# Altium PCB R3P900.PcbDoc
Units mil, origin at the board's own origin, x right, y up, seen from the top; angles counter-clockwise.
Board outline 6000 x 4000 mil, 2 copper layers (Top Layer, Bottom Layer); 10 components, 6 nets, 24 pads, 0 vias.
Unrouted connection lines stored in the file: 17.
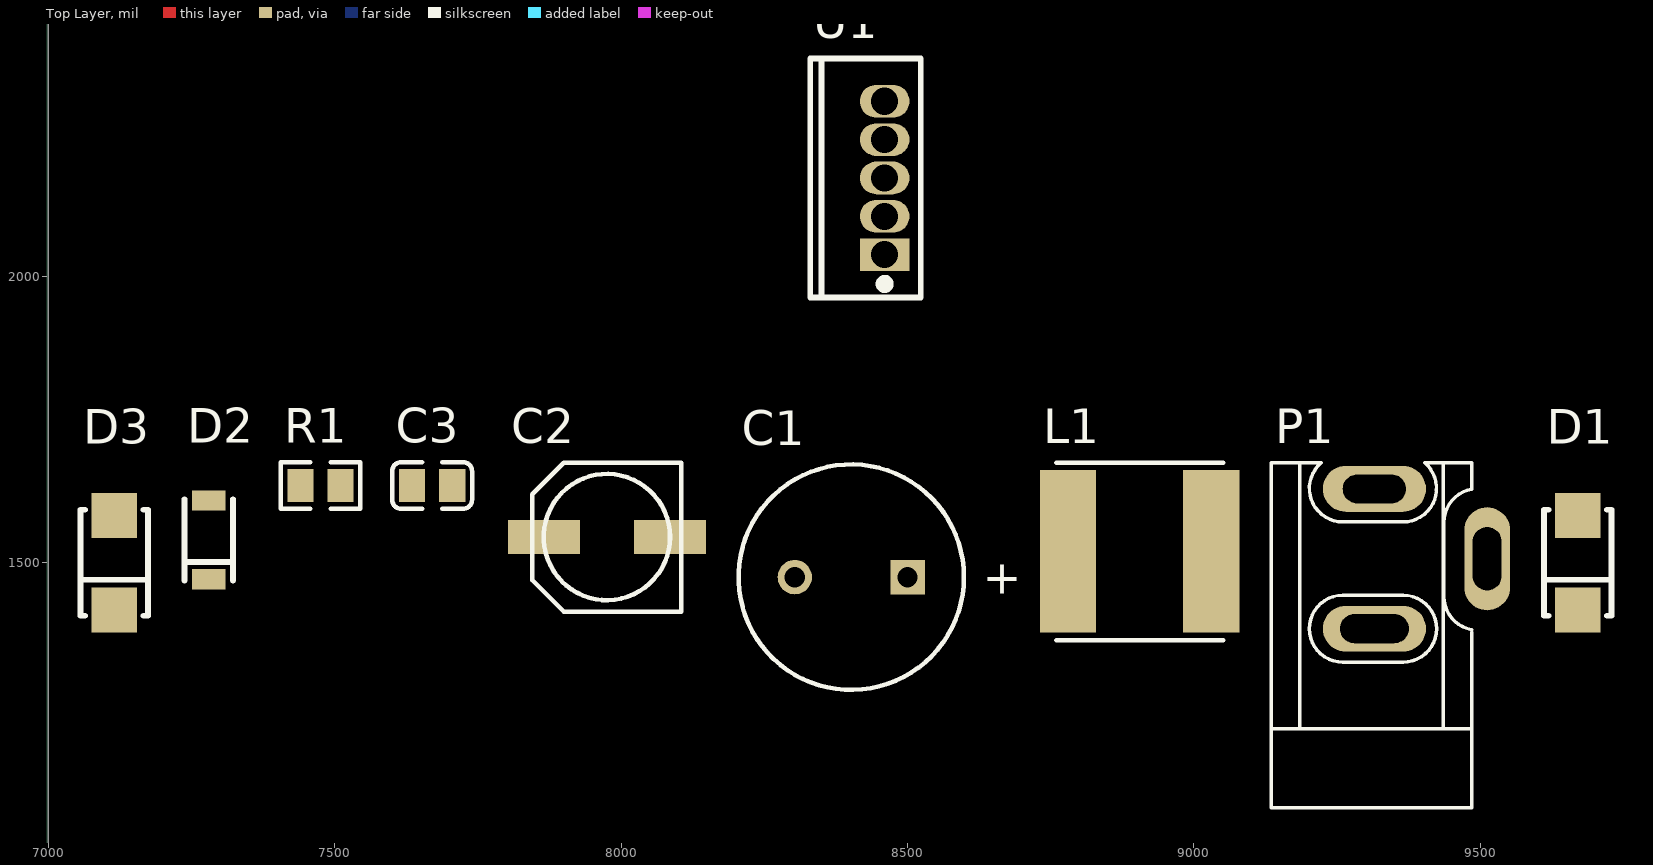
[diagram p0: Top Layer view]
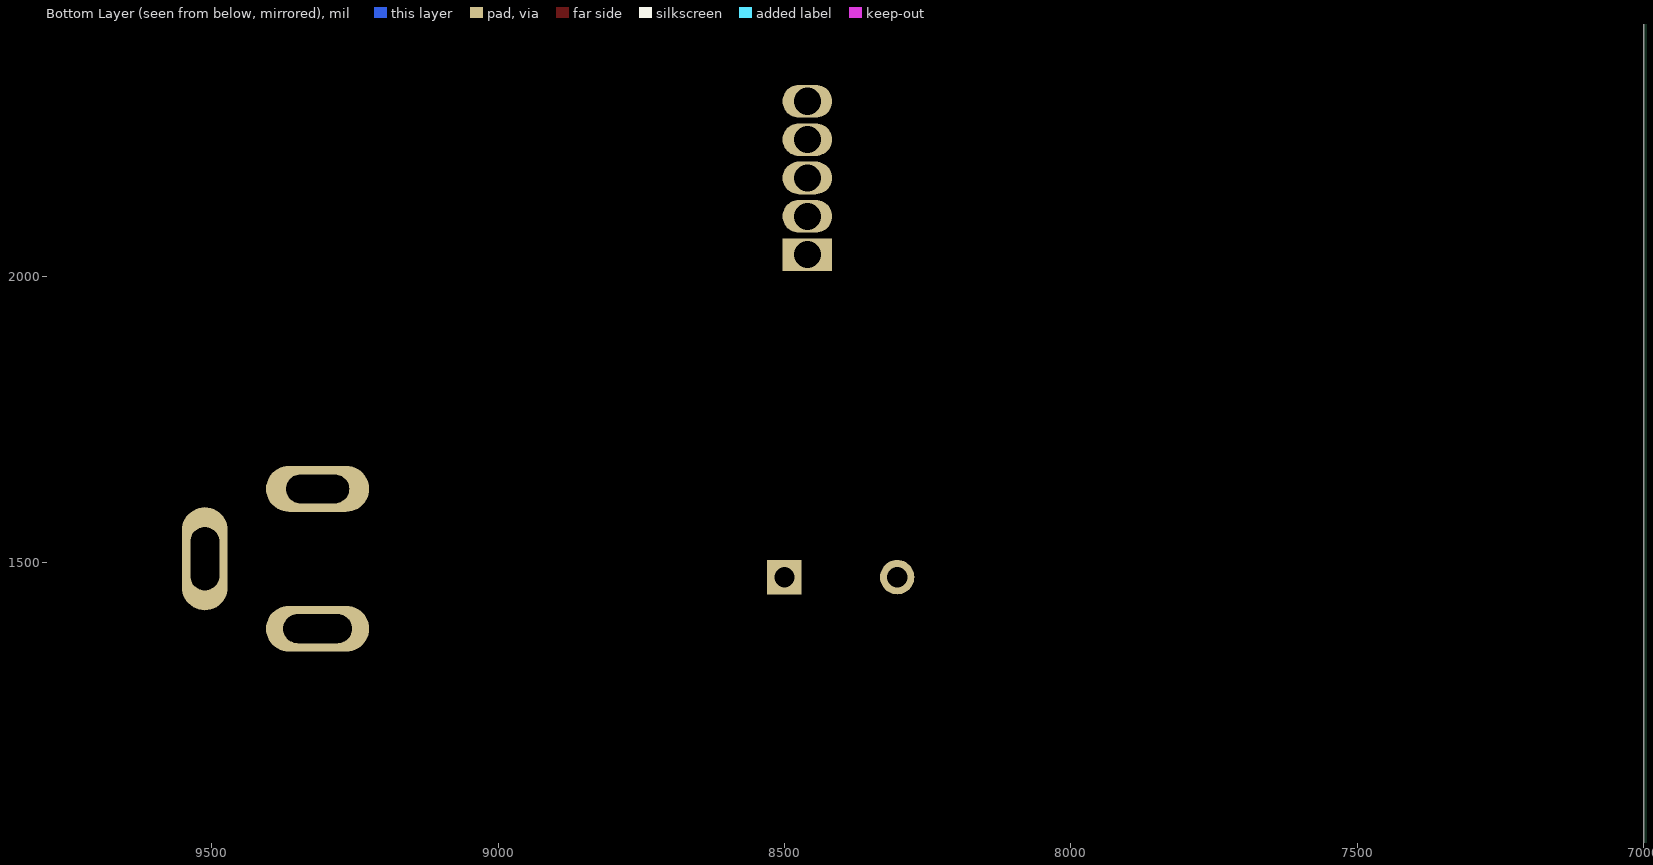
[diagram p1: Bottom Layer view, seen from below]

## Layer stack, top to bottom
Top Solder: solder mask 0.4, Solder Resist, Dk 3.5
Top Layer: signal copper 1.4
Dielectric 1: dielectric 12.6, FR-4, Dk 4.8
Bottom Layer: signal copper 1.4
Bottom Solder: solder mask 0.4, Solder Resist, Dk 3.5

## Board outline
1000,1000 7000,1000 7000,5000 1000,5000

## Design rules (kind name [scope] priority, off if disabled: settings)
Clearance [All] p1: gap=8 ignorepadtopadclearanceinfootprint=FALSE
PolygonConnect [All] p1: connectstyle=Relief reliefconductorwidth=10 reliefentries=4 polygonreliefangle="90 Angle" airgapwidth=10
RoutingVias [All] p1: holewidth=28 width=50 viastyle="Through Hole" minholewidth=28 minwidth=50 maxholewidth=28 maxwidth=50
SolderMaskExpansion [All] p1: expansion=4
Width [All] p1: maxlimit=10 minlimit=10 preferedwidth=10
30 further rules are at their usual default settings.

## Components (designator, comment, footprint, x,y, rotation, side; value= is the part's Value field where it differs from the comment)
C1 "Cap" Cap_5.0 8500,1475 r0 top value=uF
C2 "220uF" CC6.56.5 7975,1545 r0 top
C3 "100nF(104) 10% 50V" LC-0805_C 7670,1635 r0 top
D1 "SS210" LC-SMA(DO-214AC)_S1 9670,1500 r90 top
D2 "ZMM5V6" LC-LL-34 7280,1540 r90 top
D3 "SS54" LC-SMA(DO-214AC)_S1 7115,1500 r90 top
L1 "4.7uH" L_SOP74 8780,1520 r0 top
P1 "Header 3" DC10B 9485,1210 r90 top
R1 "15KΩ (1502) ±1%" LC-0805_R 7475,1635 r0 top
U1 "LM2596" LC-TO-220-5 8460,2171.93 r90 top

## Footprints (in the part's own frame and the unit in brackets; to place one, negate y for a bottom-side part, rotate by r counter-clockwise, add the part's x,y. Pads: shape width x height; smd on the part's side, far side on the other; paste and mask are expansions set on the pad)
Cap_5.0 [mil]
  rect 60x60 hole 35.43: 1(0,0)
  round 60 hole 35.43: 2(-196.85,0)
  silkscreen extent -295,-197 98,197
CC6.56.5 [mm]
  rect 3.2x1.5 smd: 1(-2.794,0) 2(2.8,0)
  silkscreen extent -3.3,-3.3 3.3,3.3
DC10B [mil]
  oval 80x180 hole 50 slot 110 at 90 deg: 1(419.09,170)
  oval 80x180 hole 50 slot 120 at 90 deg: 2(175,170)
  oval 180x80 hole 50 slot 110 at 0 deg: 3(297.05,-26.85)
  silkscreen extent -138,0 465,350
L_SOP74 [mm]
  rect 2.5x7.2 smd: 1(0,0) 2(6.35,0)
  silkscreen extent -0.51,-3.94 6.89,3.94
LC-0805_C [mm]
  rect 1.16x1.47 smd: 1(-0.89,0) 2(0.89,0)
  silkscreen extent -1.77,-1.04 1.77,1.04, body extent -1,-0.62 1,0.63, height 0.77
LC-0805_R [mm]
  rect 1.16x1.47 smd: 1(-0.89,0) 2(0.89,0)
  silkscreen extent -1.77,-1.04 1.77,1.03, body extent -1,-0.62 1,0.63, height 0.49
LC-LL-34 [mm]
  rect 0.9x1.5 smd: 1(1.75,0) 2(-1.75,0)
  silkscreen extent -1.8,-1.08 1.8,1.08
LC-SMA(DO-214AC)_S1 [mm]
  rect 2x2 smd: 1(2.1,0) 2(-2.1,0)
  silkscreen extent -2.35,-1.5 2.35,1.5
LC-TO-220-5 [mm]
  rect 1.45x2.2 hole 1.2 mask+0.051: 1(-3.4,0)
  oval 1.45x2.2 hole 1.2 mask+0.051: 2(-1.7,0) 3(0,0) 4(1.7,0) 5(3.4,0)
  silkscreen extent -5.3,-1.6 5.3,3.3

## Part data
C1: library part Cap_DIP, "Cap_DIP"
C2: library part CAP
C3: library part "0805 100nF(104) 10% 50V", "贴片电容", Package=0805, SuppliersPartNumber=C49678, ComponentLink1Description=供应商链接, ComponentLink1URL=http://www.szlcsc.com/product/details_50686.html, Supplier=LC
D1: library part "SMA(DO-214AC) SS210", "二极管", Package=SMA(DO-214AC), SuppliersPartNumber=C14996, ComponentLink1Description=供应商链接, ComponentLink1URL=http://www.szlcsc.com/product/details_15669.html, Supplier=LC
D2: library part "LL-34 ZMM5V6", "稳压二极管", Package=LL-34, SuppliersPartNumber=C8062, ComponentLink1Description=供应商链接, ComponentLink1URL=http://www.szlcsc.com/product/details_8541.html, Supplier=LC
D3: library part "SMA(DO-214AC) SS54", "二极管", Package=SMA(DO-214AC), SuppliersPartNumber=C22452, ComponentLink1Description=供应商链接, ComponentLink1URL=http://www.szlcsc.com/product/details_23178.html, Supplier=LC
L1: library part L_SOP
P1: "Header, 3-Pin", LatestRevisionDate=17-Jul-2002, LatestRevisionNote="Re-released for DXP Platform.", Publisher="Altium Limited"
R1: library part "0805 15KΩ (1502) 1%", "贴片电阻", Package=0805, SuppliersPartNumber=C17475, ComponentLink1Description=供应商链接, ComponentLink1URL=http://www.szlcsc.com/product/details_18163.html, Supplier=LC
U1: "Power Chip"

## Nets (pads, with @x,y where several pads share a name; then routed paths per layer and width w, separated by ;. In a path a pad name is that pad's centre, name@x,y a point inside that pad or via, vN(x,y) a via of type N, cw(c..) or ccw(c..) an arc to the next point about the centre after c; other vN are vias at no path point)
12_IN: D1.1 P1.1
+5: C2.1 C3.2 D2.2 L1.1 U1.4
+24: C1.1 D1.2 R1.2 U1.1
GND: C1.2 C2.2 C3.1 D2.1 D3.1 P1.2 U1.3 U1.5
NetD3_2: D3.2 L1.2 U1.2
NetR1_1: R1.1
pads on no net: P1.3

## Text inside footprints (layer, text, board x,y; h text height)
C1: Top Overlay "+" at 8631,1446 h59.06